# Altium PCB PCB_Project_11.PcbDoc
Units mm, origin at the board's own origin, x right, y up, seen from the top; angles counter-clockwise.
Board outline 300 x 150 mm, 2 copper layers (Top Layer, Bottom Layer), stack 2.07 mm thick; 12 components, 4 nets, 38 pads, 0 vias.
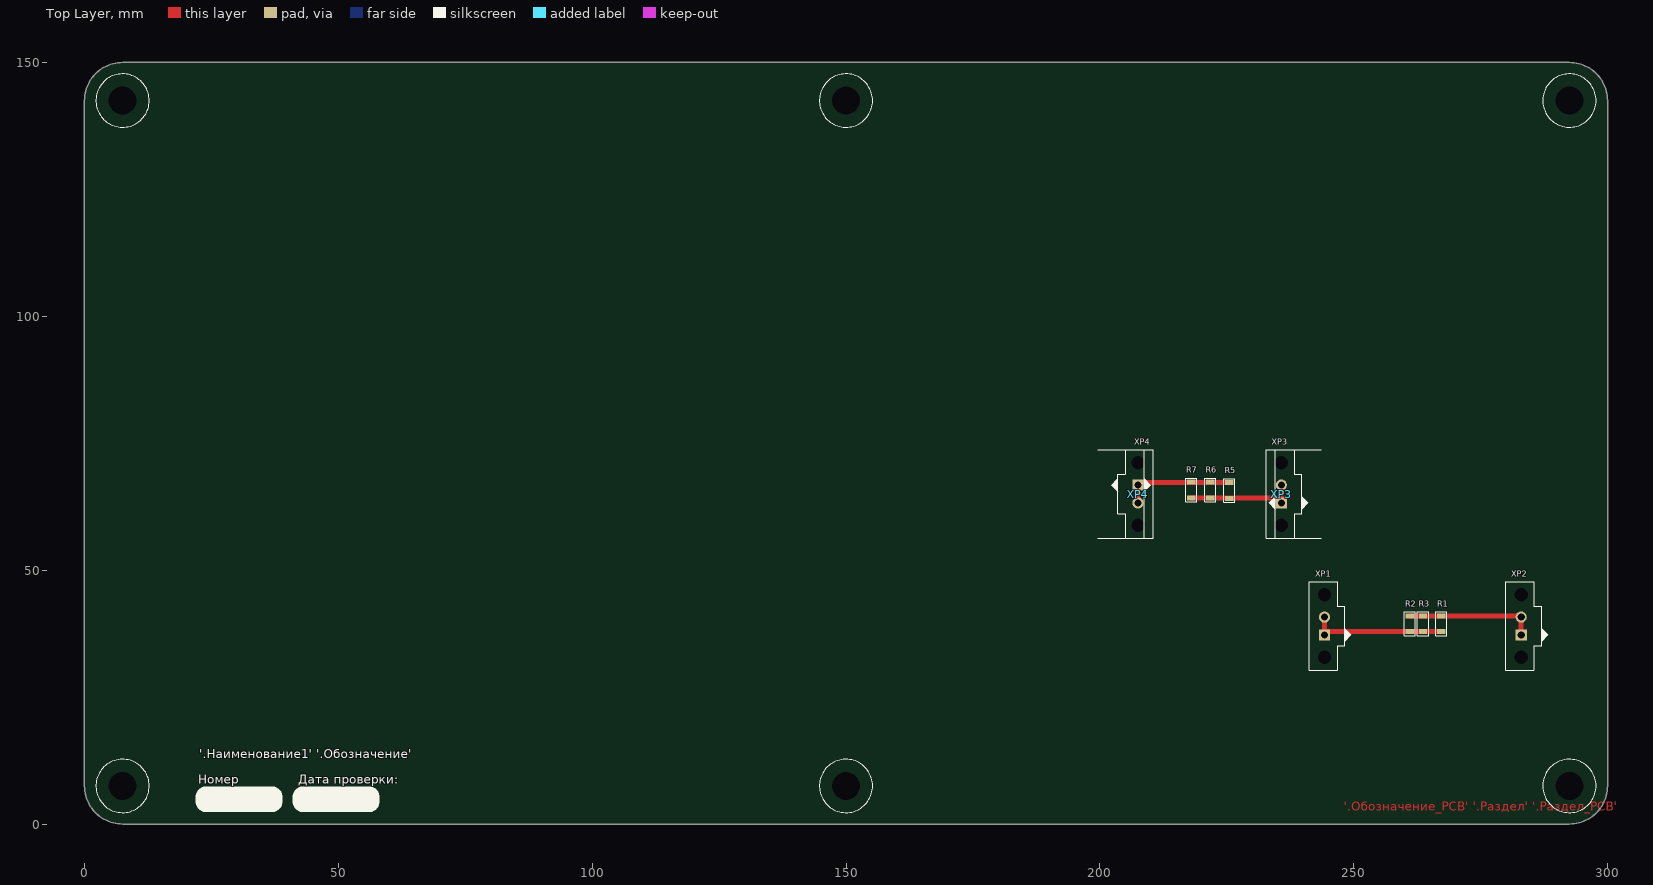
[diagram p0: Top Layer view]
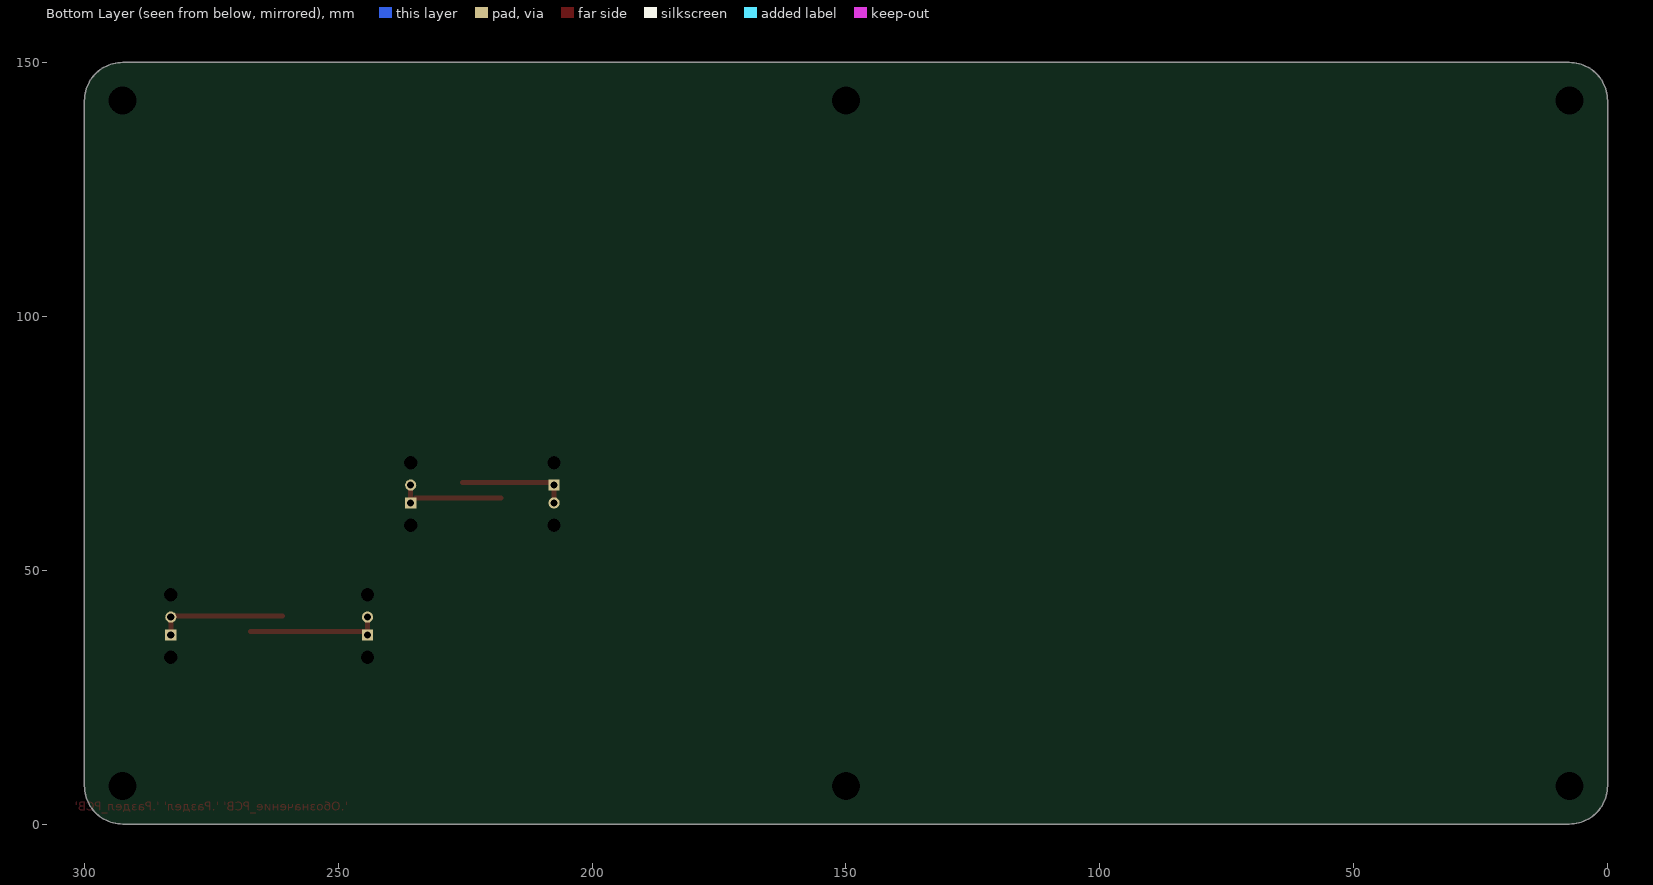
[diagram p1: Bottom Layer view, seen from below]
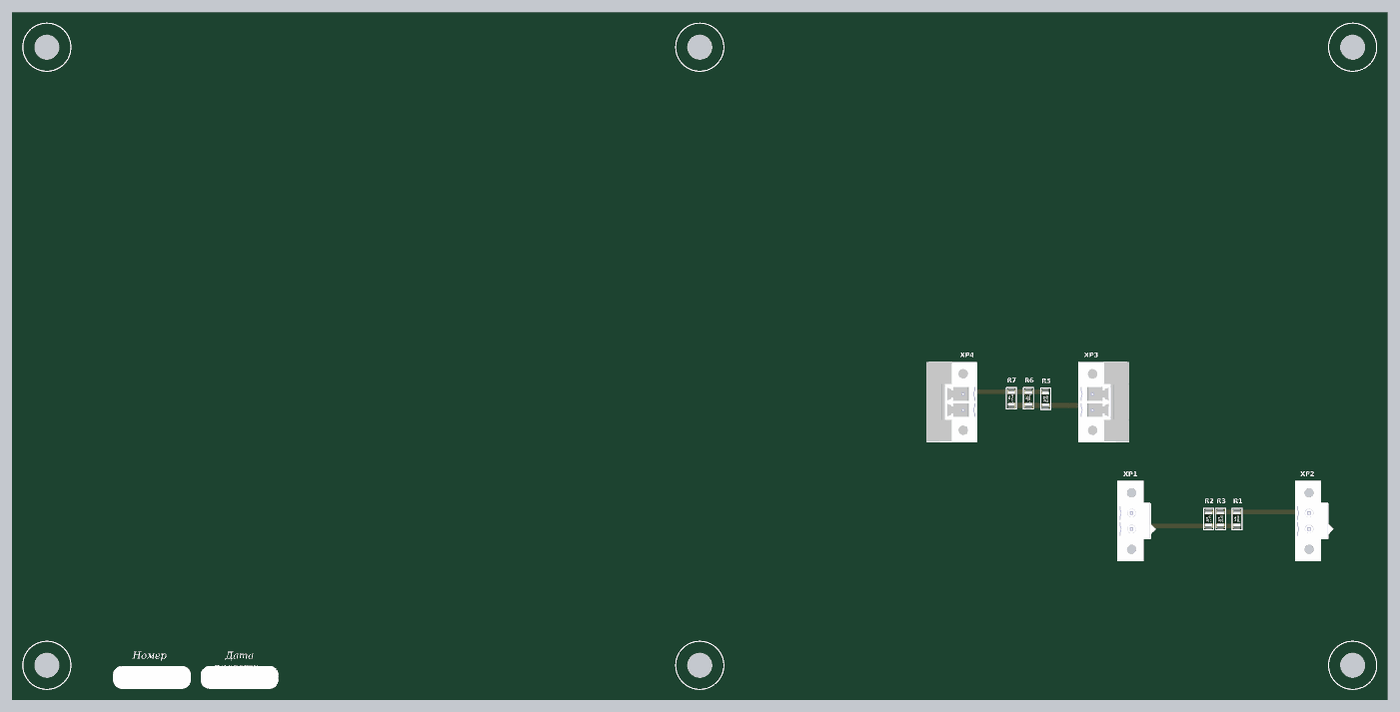
[diagram p2: 3D render of the assembled board from above, using the file's embedded part models]

## Layer stack, top to bottom
Top Solder: solder mask 0.01, Solder Resist, Dk 3.5
Top Layer: signal copper 0.035
Dielectric 1: dielectric 2, FR-4, Dk 4.8
Bottom Layer: signal copper 0.035
Bottom Solder: solder mask 0.01, Solder Resist, Dk 3.5

## Board outline
0,7.5 0,142.5 cw(c7.5,142.5) 7.5,150 292.5,150 cw(c292.5,142.5) 300,142.5 300,7.5 cw(c292.5,7.5) 292.5,0 7.5,0 cw(c7.5,7.5)

## Design rules (kind name [scope] priority, off if disabled: settings)
Clearance [All] p1: gap=0.3 ignorepadtopadclearanceinfootprint=FALSE
ComponentClearance [All] p1: gap=0.1 collisioncheckmode=3 verticalgap=0.1 showdistances=TRUE
Height [All] p1: minheight=0 maxheight=100 prefheight=12.7
HoleSize [All] p1: absolutevalues=TRUE maxlimit=10 minlimit=0.5 maxpercent=80.000 minpercent=20.000
HoleToHoleClearance [All] p1: gap=0.2 allowstackedmicrovias=TRUE
MinimumSolderMaskSliver [All] p1: minsoldermaskwidth=0.15
PlaneClearance [All] p1: clearance=0.5
PlaneConnect [All] p1: pad.planeconnectstyle=Relief pad.reliefexpansion=0.5 pad.reliefentries=4 pad.reliefconductorwidth=0.5 pad.reliefairgap=0.3 via.planeconnectstyle=Direct via.reliefexpansion=0.508 via.reliefentries=4 via.reliefconductorwidth=0.254 via.reliefairgap=0.254
PolygonConnect Direct [All] p1: connectstyle=Direct reliefconductorwidth=0.254 reliefentries=4 polygonreliefangle="90 Angle" airgapwidth=0.254
PolygonConnect [All] p2: thpad.connectstyle=Relief thpad.reliefconductorwidth=0.5 thpad.reliefentries=4 thpad.polygonreliefangle="45 Angle" thpad.airgapwidth=0.3 smdpad.connectstyle=Relief smdpad.reliefconductorwidth=0.5 smdpad.reliefentries=4 smdpad.polygonreliefangle="45 Angle" smdpad.airgapwidth=0.3 via.connectstyle=Direct via.reliefconductorwidth=0.5 via.reliefentries=4 via.polygonreliefangle="45 Angle" via.airgapwidth=0.3
RoutingCorners [All] p1: cornerstyle=45-Degree minsetback=2 maxsetback=2
RoutingVias [All] p1: holewidth=0.5 width=1 viastyle="Through Hole" minholewidth=0.5 minwidth=1 maxholewidth=5 maxwidth=10
SilkToSilkClearance [All] p1: silktosilkclearance=0.1
SilkToSolderMaskClearance [IsPad] p1: minsilkscreentomaskgap=0 clearancetoexposedcopper=TRUE
SolderMaskExpansion [All] p1: expansion=0.1 istentingtop=FALSE
UnRoutedNet [All] p1: checkbadconnections=TRUE
Width [All] p1: maxlimit=10 minlimit=0.3 preferedwidth=0.3
19 further rules are at their usual default settings.

## Components (designator, comment, footprint, x,y, rotation, side; value= is the part's Value field where it differs from the comment)
R1 "RC1206FR-072RL" 1206_(RES) 267.25,37.9 r90 top value="2 Ом"
R2 "RC1206FR-072RL" 1206_(RES) 261.05,37.896 r90 top value="2 Ом"
R3 "RC1206FR-072RL" 1206_(RES) 263.65,37.896 r90 top value="2 Ом"
R5 "RC1206FR-072RL" 1206_(RES) 225.5,64.15 r90 top value="2 Ом"
R6 "RC1206FR-072RL" 1206_(RES) 221.749,64.25 r90 top value="2 Ом"
R7 "RC1206FR-072RL" 1206_(RES) 217.999,64.25 r90 top value="2 Ом"
XP1 "15EDGVM-3.5-02P" 15EDGVM-3.5-02P-14-00A(H) 244.249,37.25 r90 top
XP2 "15EDGVM-3.5-02P" 15EDGVM-3.5-02P-14-00A(H) 282.999,37.25 r90 top
XP3 "15EDGRM-3.5-02P" "15EDGRM-3.5-02P-1Y-00A(H) (top)" 235.75,63.25 r90 top
XP3 "15EDGVM-3.5-02P" 15EDGVM-3.5-02P-14-00A(H) 235.75,63.25 r90 top
XP4 "15EDGRM-3.5-02P" "15EDGRM-3.5-02P-1Y-00A(H) (top)" 207.5,66.75 r270 top
XP4 "15EDGVM-3.5-02P" 15EDGVM-3.5-02P-14-00A(H) 207.5,66.75 r270 top

## Footprints (in the part's own frame and the unit in brackets; to place one, negate y for a bottom-side part, rotate by r counter-clockwise, add the part's x,y. Pads: shape width x height; smd on the part's side, far side on the other; paste and mask are expansions set on the pad)
"15EDGRM-3.5-02P-1Y-00A(H) (top)" [mm] "Pluggable Terminal Block"
  rect 2.2x2.2 hole 1.4: 1(0,0)
  round 2.2 hole 1.4: 2(3.5,0)
  silkscreen extent -6.95,-7.9 10.45,2.4, body extent -6.95,-8 10.45,1.2, height 7.24
15EDGVM-3.5-02P-14-00A(H) [mm] "Pluggable Terminal Block"
  round 0 hole 2.6 unplated: 0(-4.42,0) 0(7.92,0)
  rect 2.2x2.2 hole 1.4: 1(0,0)
  round 2.2 hole 1.4: 2(3.5,0)
  Top Layer pour cut-out: 6.17,0 6.404,-0.875 7.045,-1.516 7.92,-1.75 7.92,-1.75 8.59,-1.617 9.157,-1.237 9.537,-0.67 9.67,0 9.67,0 9.537,0.67 9.157,1.237 8.59,1.617 7.92,1.75 7.92,1.75 7.25,1.617 6.683,1.237 6.303,0.67 6.17,0
  Top Layer pour cut-out: -6.17,0 -5.936,-0.875 -5.295,-1.516 -4.42,-1.75 -4.42,-1.75 -3.75,-1.617 -3.183,-1.237 -2.803,-0.67 -2.67,0 -2.67,0 -2.803,0.67 -3.183,1.237 -3.75,1.617 -4.42,1.75 -4.42,1.75 -5.09,1.617 -5.657,1.237 -6.037,0.67 -6.17,0
  Bottom Layer pour cut-out: 6.17,0 6.404,-0.875 7.045,-1.516 7.92,-1.75 7.92,-1.75 8.59,-1.617 9.157,-1.237 9.537,-0.67 9.67,0 9.67,0 9.537,0.67 9.157,1.237 8.59,1.617 7.92,1.75 7.92,1.75 7.25,1.617 6.683,1.237 6.303,0.67 6.17,0
  Bottom Layer pour cut-out: -6.17,0 -5.936,-0.875 -5.295,-1.516 -4.42,-1.75 -4.42,-1.75 -3.75,-1.617 -3.183,-1.237 -2.803,-0.67 -2.67,0 -2.67,0 -2.803,0.67 -3.183,1.237 -3.75,1.617 -4.42,1.75 -4.42,1.75 -5.09,1.617 -5.657,1.237 -6.037,0.67 -6.17,0
  silkscreen extent -6.95,-5.2 10.45,3, body extent -6.95,-4.24 10.45,3, height 9.2
1206_(RES) [mm]
  rect 1x1.6 smd: 1(0,0) 2(3.1,0)
  silkscreen extent -0.8,-1.1 3.9,1.1, body extent -0.72,-0.8 3.82,0.8, height 1.25

## Part data
R1 R2 R3 R5 R6 R7: "RES SMD 2 OHM 1% 1/4W 1206", CasePackage=1206, Manufacturer=Yageo, Tolerance=1%, Category=Резистор, ComponentLink1Description=Datasheet, ComponentLink1URL=http://www.yageo.com/documents/recent/PYu-RC_Group_51_RoHS_L_04.pdf, ManufacturerPartNumber=RC1206FR-072RL, Наименование="RC1206FR-072RL 2 Ом 1% 1206 Yageo"
XP1 XP2 XP3 XP4: "vertical, screw, 7A, 250V, 3.5mm", Manufacturer=DEGSON, 1=R, 2=R, Category=Вилка, ComponentLink1Description=degson_details, ComponentLink1URL=https://www.degson.com/content/details_552_4151594.html?lang=en, developer=Коннов, development_date=12.12.2023, ManufacturerPartNumber=15EDGVM-3.5-02P, Наименование="15EDGVM-3.5-02P DEGSON"
XP3 XP4: "horizontal, screw, 7A, 250V, 3.5mm"

## Free pads (board coordinates)
  round 0 hole 5.5 unplated: 0(7.5,7.5) 0(7.5,142.5) 0(150,7.5) 0(150,142.5) 0(292.5,7.5) 0(292.5,142.5)

## Nets (pads, with @x,y where several pads share a name; then routed paths per layer and width w, separated by ;. In a path a pad name is that pad's centre, name@x,y a point inside that pad or via, vN(x,y) a via of type N, cw(c..) or ccw(c..) an arc to the next point about the centre after c; other vN are vias at no path point)
NetR1_1: R1.1 R2.1 R3.1 XP1.1 XP1.2 | length 26.8
  Top Layer w1: XP1.2 XP1.1 244.899,37.9 R1.1
NetR1_2: R1.2 R2.2 R3.2 XP2.1 XP2.2 | length 25.6
  Top Layer w1: R2.2 R3.2 282.753,40.996 XP2.2 XP2.1
NetR5_1: R5.1 R6.1 R7.1 XP3.1 XP3.2 | length 21.7
  Top Layer w1: R7.1 R6.1 225.5,64.25 234.75,64.25 235.75,63.25 XP3.2@235.75,66.75
NetR5_2: R5.2 R6.2 R7.2 XP4.1 XP4.2 | length 21.7
  Top Layer w1: XP4.2@207.5,63.25 207.5,66.75 208,67.25 R5.2
pads on no net: XP1.0 XP2.0 XP3.0 XP4.0

## Polygon pours and split planes (outlines as drawn)
no net on Top SB (solid): 41.063,4.366 ccw(c43.063,4.366) 43.063,2.366 45.963,2.366 48.502,2.366 50.402,2.366 56.063,2.366 ccw(c56.063,4.366) 58.063,4.366 58.063,5.366 ccw(c56.063,5.366) 56.055,7.366 52.998,7.366 49.098,7.366 43.063,7.366 ccw(c43.063,5.366) 41.063,5.366
no net on Top SB (solid): 38.937,4.366 cw(c36.937,4.366) 36.937,2.366 34.037,2.366 31.498,2.366 29.598,2.366 23.937,2.366 cw(c23.937,4.366) 21.937,4.366 21.937,5.366 cw(c23.937,5.366) 23.945,7.366 27.002,7.366 30.902,7.366 36.937,7.366 cw(c36.937,5.366) 38.937,5.366
no net on Top Overlay (solid): 41.063,4.366 ccw(c43.063,4.366) 43.063,2.366 45.963,2.366 48.502,2.366 50.402,2.366 56.063,2.366 ccw(c56.063,4.366) 58.063,4.366 58.063,5.366 ccw(c56.063,5.366) 56.055,7.366 52.998,7.366 49.098,7.366 43.063,7.366 ccw(c43.063,5.366) 41.063,5.366
no net on Top Overlay (solid): 38.937,4.366 cw(c36.937,4.366) 36.937,2.366 34.037,2.366 31.498,2.366 29.598,2.366 23.937,2.366 cw(c23.937,4.366) 21.937,4.366 21.937,5.366 cw(c23.937,5.366) 23.945,7.366 27.002,7.366 30.902,7.366 36.937,7.366 cw(c36.937,5.366) 38.937,5.366

## Other copper
Top Layer:
  pour cut-out: 7.5,17.5 ccw(c7.5,7.5) -2.5,7.5 ccw(c7.499,7.5) 7.499,-2.5 ccw(c7.5,7.5) 17.5,7.5 ccw(c7.5,7.5)
  pour cut-out: 150,152.5 ccw(c150,142.5) 140,142.5 ccw(c149.999,142.5) 149.999,132.5 ccw(c150,142.5) 160,142.5 ccw(c150,142.5)
  pour cut-out: 292.5,152.5 ccw(c292.5,142.5) 282.5,142.5 ccw(c292.499,142.5) 292.499,132.5 ccw(c292.5,142.5) 302.5,142.5 ccw(c292.5,142.5)
  pour cut-out: 7.5,152.5 ccw(c7.5,142.5) -2.5,142.5 ccw(c7.499,142.5) 7.499,132.5 ccw(c7.5,142.5) 17.5,142.5 ccw(c7.5,142.5)
  pour cut-out: 150,17.5 ccw(c150,7.5) 140,7.5 ccw(c149.999,7.5) 149.999,-2.5 ccw(c150,7.5) 160,7.5 ccw(c150,7.5)
  pour cut-out: 292.5,17.5 ccw(c292.5,7.5) 282.5,7.5 ccw(c292.499,7.5) 292.499,-2.5 ccw(c292.5,7.5) 302.5,7.5 ccw(c292.5,7.5)
  text "'.Обозначение_PCB' '.Раздел' '.Раздел_PCB'" at 248.04,2.063 h3
Bottom Layer:
  pour cut-out: 150,152.5 ccw(c150,142.5) 140,142.5 ccw(c149.999,142.5) 149.999,132.5 ccw(c150,142.5) 160,142.5 ccw(c150,142.5)
  pour cut-out: 292.5,152.5 ccw(c292.5,142.5) 282.5,142.5 ccw(c292.499,142.5) 292.499,132.5 ccw(c292.5,142.5) 302.5,142.5 ccw(c292.5,142.5)
  pour cut-out: 7.5,152.5 ccw(c7.5,142.5) -2.5,142.5 ccw(c7.499,142.5) 7.499,132.5 ccw(c7.5,142.5) 17.5,142.5 ccw(c7.5,142.5)
  pour cut-out: 150,17.5 ccw(c150,7.5) 140,7.5 ccw(c149.999,7.5) 149.999,-2.5 ccw(c150,7.5) 160,7.5 ccw(c150,7.5)
  pour cut-out: 292.5,17.5 ccw(c292.5,7.5) 282.5,7.5 ccw(c292.499,7.5) 292.499,-2.5 ccw(c292.5,7.5) 302.5,7.5 ccw(c292.5,7.5)
  pour cut-out: 7.5,17.5 ccw(c7.5,7.5) -2.5,7.5 ccw(c7.499,7.5) 7.499,-2.5 ccw(c7.5,7.5) 17.5,7.5 ccw(c7.5,7.5)

## Silkscreen, mask and mechanical layers (free items; w line width, h text height)
Top Overlay:
  circle w0.2: c150,142.5 r5.25
  circle w0.2: c292.5,142.5 r5.25
  circle w0.2: c7.5,142.5 r5.25
  circle w0.2: c150,7.5 r5.25
  circle w0.2: c292.5,7.5 r5.25
  circle w0.2: c7.5,7.5 r5.25
  text "'.Наименование1' '.Обозначение'" at 22.65,12.395 h3
  text "Номер" at 22.441,7.366 h3
  text "Дата проверки:" at 42.059,7.366 h3
Top Solder:
  text "'.Обозначение_PCB' '.Раздел' '.Раздел_PCB'" at 248.04,2.063 h3
Outline:
  the board outline again, w0.2
Top SB:
  text "'.Обозначение_PCB' '.Раздел' '.Раздел_PCB'" at 248.04,2.063 h3